# EAGLE board cnc_breakout (EAGLE 5.06)
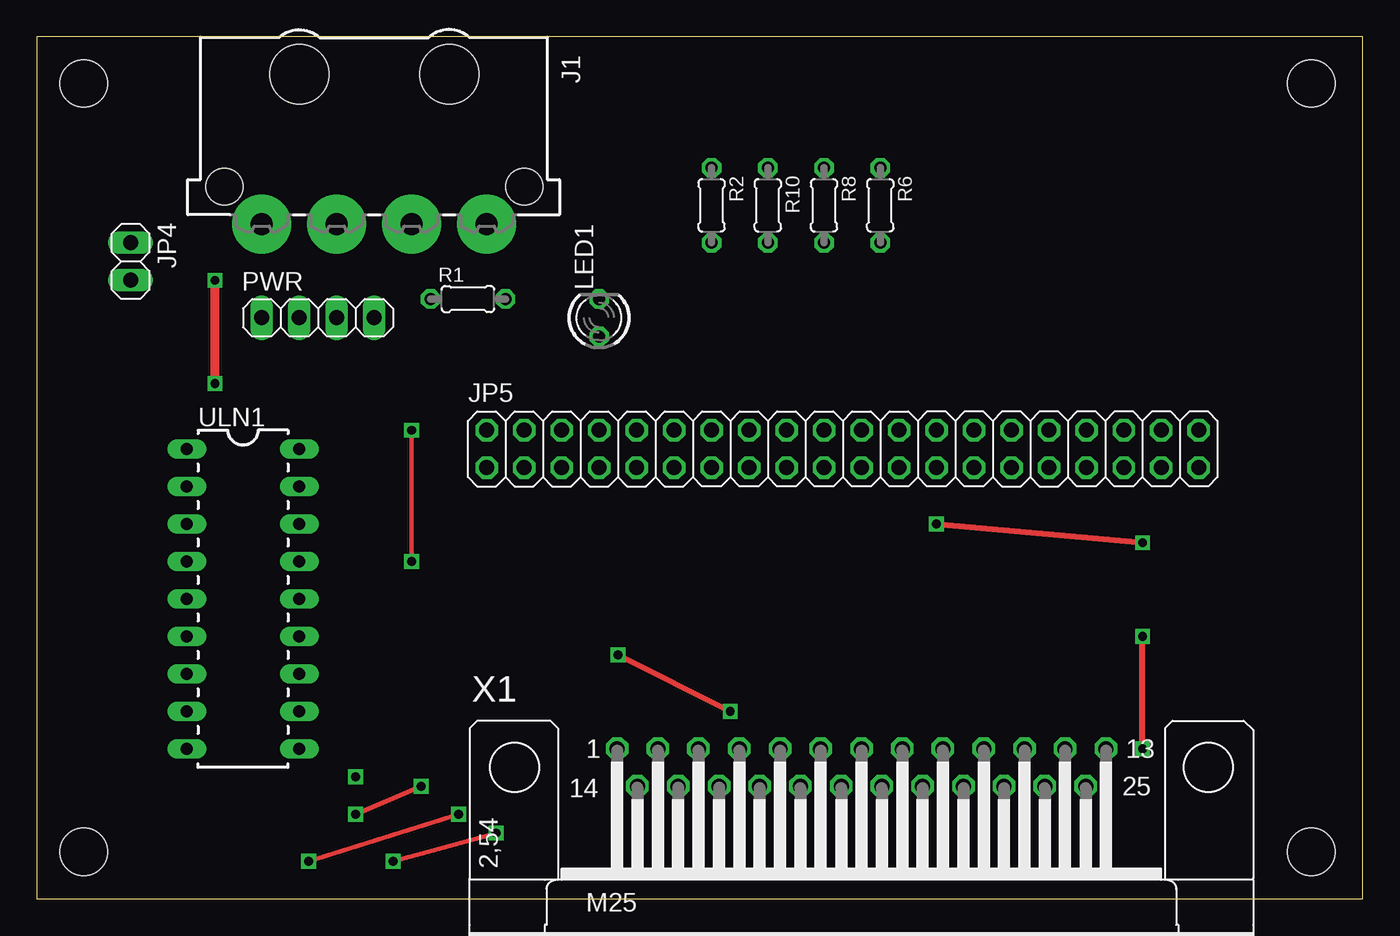
[diagram p0: board, top side]
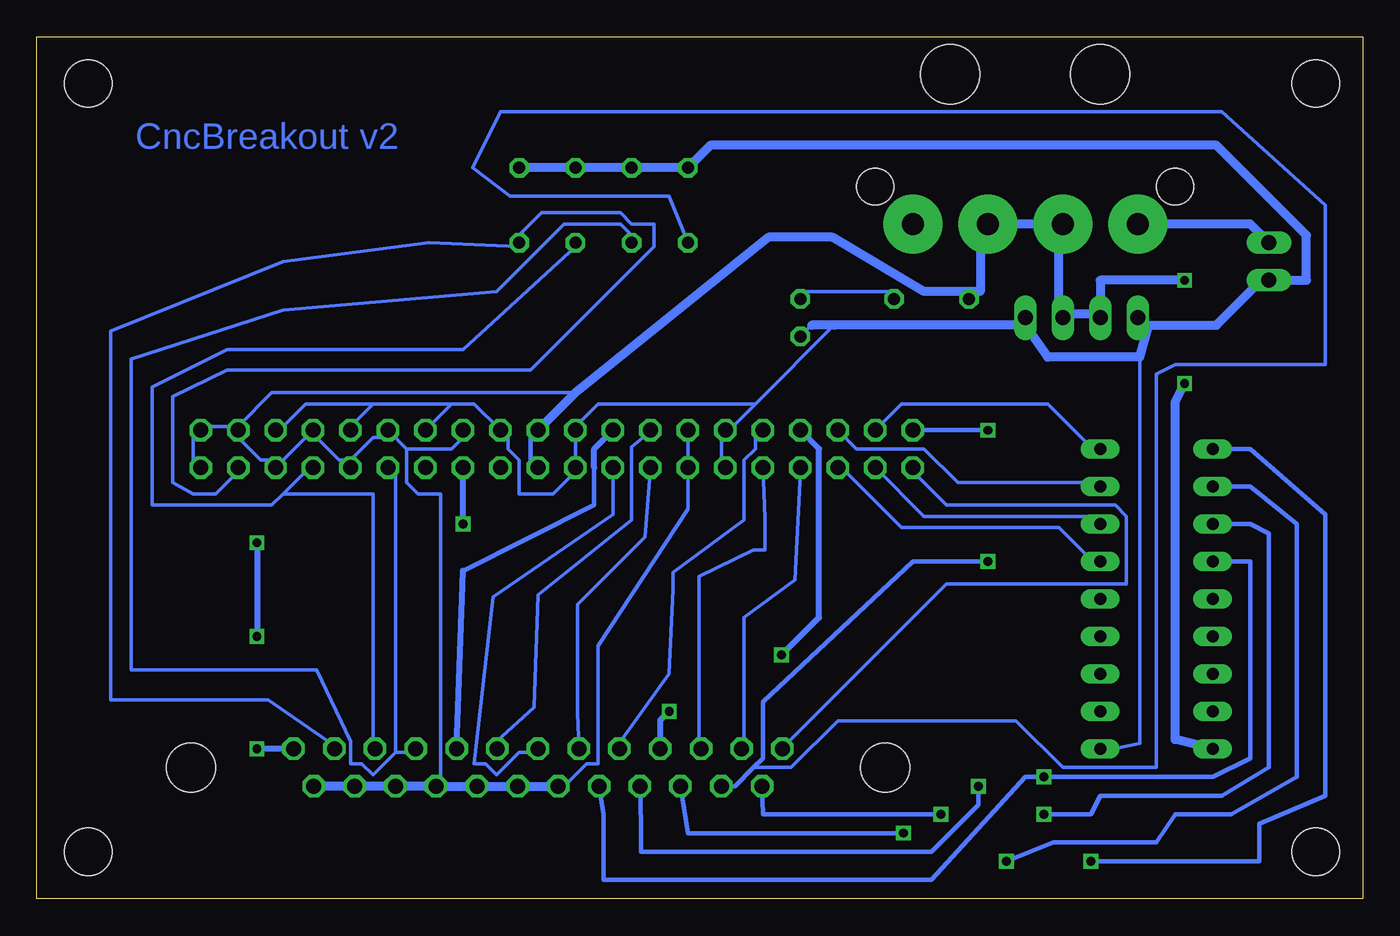
[diagram p1: board, bottom side, seen from below]

Size 89.84 x 58.41 mm. Coordinates in mm from the lower left corner, seen from the top.
Outline: 0,0 89.84,0 89.84,58.41 0,58.41 0,0
Copper layers (1*16): Top 0.035mm / dielectric 1.5mm / Bottom 0.035mm
Design rules "default": minimum track width 10mil, minimum drill 24mil, track to track 8mil, track to pad 8mil, pad to pad 8mil, via to via 8mil, smd to smd 8mil, copper to edge 40mil, drill to drill 8mil, minimum pad ring 10mil, minimum via ring 8mil, stop-mask expansion 4mil, vias tented up to drill 0mil, thermal gap 10mil
Holes 3.2 mm at 3.17,55.24 86.36,55.24 86.36,3.17 3.17,3.17

## Footprints (pad centres in the part's own frame; a part is rotated, then mirrored left to right if it is on the bottom)
827001 = drill 1.5 pad 4 round: 1 -7.62,0; 2 -2.54,0; 3 2.54,0; 4 7.62,0 | hole 4: 5.08,-10.16; -5.08,-10.16 | hole 2.5: 10.16,-2.54; -10.16,-2.54
1X02 = drill 1.016 long: 1 -1.27,0; 2 1.27,0
2X20 = drill 1.016 octagon: 1 -24.13,-1.27; 2 -24.13,1.27; 3 -21.59,-1.27; 4 -21.59,1.27; 5 -19.05,-1.27; 6 -19.05,1.27; 7 -16.51,-1.27; 8 -16.51,1.27; 9 -13.97,-1.27; 10 -13.97,1.27; 11 -11.43,-1.27; 12 -11.43,1.27; 13 -8.89,-1.27; 14 -8.89,1.27; 15 -6.35,-1.27; 16 -6.35,1.27; 17 -3.81,-1.27; 18 -3.81,1.27; 19 -1.27,-1.27; 20 -1.27,1.27; 21 1.27,-1.27; 22 1.27,1.27; 23 3.81,-1.27; 24 3.81,1.27; 25 6.35,-1.27; 26 6.35,1.27; 27 8.89,-1.27; 28 8.89,1.27; 29 11.43,-1.27; 30 11.43,1.27; 31 13.97,-1.27; 32 13.97,1.27; 33 16.51,-1.27; 34 16.51,1.27; 35 19.05,-1.27; 36 19.05,1.27; 37 21.59,-1.27; 38 21.59,1.27; 39 24.13,-1.27; 40 24.13,1.27
LED3MM = drill 0.813 octagon: A -1.27,0; K 1.27,0
1X04 = drill 1.016 long: 1 -3.81,0; 2 -1.27,0; 3 1.27,0; 4 3.81,0
0204/5 = drill 0.813 octagon: 1 -2.54,0; 2 2.54,0
DIL18 = drill 0.813 long: 1 -10.16,-3.81; 2 -7.62,-3.81; 3 -5.08,-3.81; 4 -2.54,-3.81; 5 0,-3.81; 6 2.54,-3.81; 7 5.08,-3.81; 8 7.62,-3.81; 9 10.16,-3.81; 10 10.16,3.81; 11 7.62,3.81; 12 5.08,3.81; 13 2.54,3.81; 14 0,3.81; 15 -2.54,3.81; 16 -5.08,3.81; 17 -7.62,3.81; 18 -10.16,3.81
M25H = drill 1.016 octagon: 1 -16.561,1.27; 2 -13.792,1.27; 3 -11.049,1.27; 4 -8.28,1.27; 5 -5.512,1.27; 6 -2.769,1.27; 7 0,1.27; 8 2.769,1.27; 9 5.512,1.27; 10 8.28,1.27; 11 11.049,1.27; 12 13.792,1.27; 13 16.561,1.27; 14 -15.189,-1.27; 15 -12.421,-1.27; 16 -9.652,-1.27; 17 -6.909,-1.27; 18 -4.14,-1.27; 19 -1.372,-1.27; 20 1.372,-1.27; 21 4.14,-1.27; 22 6.909,-1.27; 23 9.652,-1.27; 24 12.421,-1.27; 25 15.189,-1.27 | hole 3.302: 23.52,0; -23.52,0

## Placement (x,y rotation side)
J1  [827001]  22.86,45.72 180 top
JP4  [1X02]  6.35,43.18 270 top
JP5  [2X20]  54.61,30.48 0 top
LED1  [LED3MM]  38.1,39.37 90 top
PWR  [1X04]  19.05,39.37 0 top
R1  270  [0204/5]  29.21,40.64 0 top
R2  [0204/5]  45.72,46.99 270 top
R6  [0204/5]  57.15,46.99 270 top
R8  [0204/5]  53.34,46.99 270 top
R10  [0204/5]  49.53,46.99 270 top
ULN1  [DIL18]  13.97,20.32 270 top
X1  [M25H]  55.88,8.89 0 top

## Library data of the parts
J1 = con-amp
JP4 = pinhead-1
JP5 PWR = pinhead
LED1 = led
R1 R2 R6 R8 R10 = rcl
ULN1 = SparkFun
X1 = con-subd

## Nets
A_DIR: JP5.18 X1.9
A_STP: JP5.16 X1.8
AUX1: ULN1.2 X1.16
AUX1_AMP: JP5.6 ULN1.17
AUX2: ULN1.3 X1.17
AUX2_AMP: JP5.3 ULN1.16
AUX3: ULN1.4 X1.18
AUX3_AMP: JP5.5 ULN1.15
GND: J1.2 J1.3 JP5.13 JP5.14 JP5.21 JP5.22 JP5.26 JP5.30 JP5.31 JP5.34 JP5.35 JP5.38 JP5.39 JP5.40 PWR.2 PWR.3 R1.1 ULN1.9 X1.19 X1.20 X1.21 X1.22 X1.23 X1.24 X1.25
MACHINE_ERROR: JP5.25 X1.13
N$2: J1.4 JP4.1
N$50: LED1.K R1.2
P: JP5.27
PC_ENABLE: JP5.1 X1.1
PROBE_IN: JP5.2 R2.2 X1.15
SPINDLE_PWM_OUT: ULN1.1 X1.14
SPINDLE_PWM_OUT_AMP: JP5.4 ULN1.18
VDD: JP4.2 JP5.11 JP5.12 JP5.19 JP5.20 JP5.24 JP5.28 JP5.32 JP5.36 LED1.A PWR.1 PWR.4 R2.1 R6.1 R8.1 R10.1 ULN1.10
X: JP5.23
X_DIR: JP5.9 X1.3
X_STP: JP5.7 X1.2
XHOME_SW+: JP5.29 R10.2 X1.10
Y_DIR: JP5.10 X1.5
Y_STP: JP5.8 X1.4
YHOME_SW+: JP5.33 R8.2 X1.11
Z_DIR: JP5.17 X1.7
Z_STP: JP5.15 X1.6
ZHOME_SW+: JP5.37 R6.2 X1.12

## Tracks (layer width: path | path; a pad name or v marks a point on that pad's centre or on a via)
A_DIR
  Bottom 0.305: 52.07,29.21 52.07,26.67 60.96,22.23
  Bottom 0.406: X1.9 60.96,22.23 | JP5.18 52.07,30.48 52.07,29.21
A_STP
  Bottom 0.254: X1.8 58.67,10.67 56.13,12.95 55.88,20.57 49.53,25.65 49.53,30.61 48.77,31.24 JP5.16
AUX1  (via drill 0.6)
  Top 0.305: v24.13,2.54 v31.11,4.45
  Bottom 0.305: ULN1.2 7.62,27.94 4.45,25.4 4.45,8.26 8.89,5.71 12.7,5.71 13.97,3.81 20.95,3.81 v24.13,2.54 | X1.16 45.72,4.45 v31.11,4.45
AUX1_AMP
  Bottom 0.254: ULN1.17 18.29,28.19 27.43,28.19 29.72,30.48 34.29,30.48 JP5.6
AUX2  (via drill 0.6)
  Top 0.305: v21.59,5.71 v26.04,7.62
  Bottom 0.305: ULN1.3 7.62,25.4 6.35,24.77 6.35,8.89 9.53,6.99 17.78,6.99 18.41,5.71 v21.59,5.71 | X1.17 48.9,5.08 48.9,3.17 29.21,3.17 26.04,6.35 v26.04,7.62
AUX2_AMP
  Bottom 0.254: ULN1.16 18.29,25.91 29.72,25.91 JP5.3
AUX3  (via drill 0.6)
  Bottom 0.305: ULN1.4 7.62,22.86 7.62,9.53 10.16,8.26 v21.59,8.26 22.86,8.26 29.21,1.27 31.75,1.27 | X1.18 51.44,5.71 51.44,1.27 31.75,1.27 | 31.75,1.27 31.11,1.27
AUX3_AMP
  Bottom 0.254: ULN1.15 18.29,22.86 20.57,25.15 31.24,25.15 35.05,28.96 JP5.5
GND  (via drill 0.6)
  Top 0.61: v12.06,34.92 v12.06,41.91
  Bottom 0.254: JP5.14 JP5.13 45.72,26.42 51.82,17.14 51.82,9.14 52.58,9.14 54.1,7.62 X1.19 | PWR.3 20.57,39.62 | 20.57,45.72 J1.3 | 76.2,32 78.49,32 JP5.40 79.25,31.24 79.25,29.72 JP5.39 | 64.77,30.48 61.72,30.48 60.96,31.24 JP5.26 | 64.77,30.48 JP5.30 66.29,31.24 67.06,31.24 68.58,29.72 | 68.58,29.72 69.34,29.72 70.87,31.24 JP5.34 JP5.35 73.91,29.72 74.68,29.72 76.2,31.24 JP5.38 76.2,32 | 68.58,29.72 JP5.31 | 9.91,10.67 ULN1.9 | 76.2,32 73.91,34.29 53.34,34.29 | J1.2 25.91,45.72 | 26.67,41.15 R1.1 | 64.77,30.48 64.77,28.19 64.01,27.43 62.48,27.43 62.48,7.62 X1.22
  Bottom 0.305: JP5.21 56.39,29.72 56.39,31.24 JP5.22
  Bottom 0.61: X1.25 X1.24 X1.23 X1.22 | X1.19 X1.20 X1.21 62.48,7.62 | PWR.3 19.81,39.62 18.29,39.62 PWR.2 17.78,41.91 v12.06,41.91 | 20.57,39.62 20.57,45.72 J1.2 | JP5.22 53.34,34.29 40.26,44.83 35.94,44.83 29.72,41.15 26.67,41.15 25.91,41.15 25.91,45.72 | v12.06,34.92 12.7,33.66 12.7,10.79 ULN1.9
MACHINE_ERROR  (via drill 0.6)  (1 unrouted)
  Top 0.406: v60.96,25.4 v74.93,24.13 | v74.93,10.16 74.93,17.78
  Bottom 0.406: v60.96,25.4 JP5.25 | X1.13 v74.93,10.16 | v74.93,24.13 74.93,17.78
N$1  (via drill 0.6)
  other vias: 74.93,17.78
N$2
  Bottom 0.61: J1.4 7.62,45.72 JP4.1
N$50
  Bottom 0.254: R1.2 32,41.15 38.1,41.15 LED1.K
PC_ENABLE
  Bottom 0.254: JP5.1 30.48,28.96 28.19,26.67 16.76,26.67 16,25.91 16,21.34 28.19,21.34 38.86,10.67 X1.1
PROBE_IN  (via drill 0.6)
  Top 0.305: v25.4,22.86 v25.4,31.75
  Bottom 0.254: R2.2 46.99,47.62 57.78,47.62 60.33,49.53 58.42,53.34 9.53,53.34 2.54,46.99 2.54,36.2 12.7,36.2 13.97,35.56 13.97,8.89 20.32,8.89 23.5,12.06 35.56,12.06 38.73,8.89 41.27,8.89
  Bottom 0.305: X1.15 42.55,7.62 41.27,8.89 40.64,9.53 40.64,13.34 30.48,22.86 v25.4,22.86 | v25.4,31.75 JP5.2
SPINDLE_PWM_OUT  (via drill 0.6)
  Top 0.305: v18.41,2.54 v28.57,5.71
  Bottom 0.305: ULN1.1 7.62,30.48 2.54,26.04 2.54,6.99 6.99,5.08 6.99,2.54 v18.41,2.54 | X1.14 40.64,5.71 v28.57,5.71
SPINDLE_PWM_OUT_AMP
  Bottom 0.254: ULN1.18 18.29,30.48 21.34,33.53 31.24,33.53 JP5.4
VDD
  Bottom 0.254: 61.72,33.53 60.2,33.53 JP5.24 57.91,31.24 57.91,30.48 57.15,29.72 57.15,27.43 54.86,27.43 53.34,28.96 JP5.19 JP5.20 53.34,32 51.82,33.53 41.15,33.53 | 61.72,33.53 JP5.28 | 67.06,33.53 68.58,32 JP5.32 | 61.72,33.53 67.06,33.53 | 67.06,33.53 71.63,33.53 73.15,32 JP5.36 | JP5.11 43.43,29.72 43.43,31.24 JP5.12 42.67,32 41.15,33.53 | 37.34,38.86 LED1.A | 35.81,38.86 41.15,33.53 | 15.11,36.7 15.11,10.54 17.53,10.03 ULN1.10 | 6.86,41.91 JP4.2 | 22.86,38.86 PWR.4
  Bottom 0.61: 37.34,38.86 35.81,38.86 22.86,38.86 21.34,36.7 15.11,36.7 14.48,38.86 | R6.1 R8.1 R10.1 R2.1 44.2,51.05 9.91,51.05 3.81,44.96 3.81,41.91 JP4.2 | 14.48,38.86 15.24,38.86 PWR.1 | 6.86,41.91 9.91,38.86 14.48,38.86
X_DIR
  Bottom 0.254: JP5.9 40.51,25.78 40.51,23.62 41.27,23.62 44.96,21.84 44.96,10.67 X1.3
X_STP
  Bottom 0.254: X1.2 41.91,10.67 41.91,19.05 38.48,21.59 38.1,28.96 JP5.7
XHOME_SW+
  Bottom 0.254: 65.53,9.91 67.06,8.38 67.82,9.14 68.58,9.14 68.58,10.67 70.87,15.49 83.44,15.49 83.44,36.58 73.15,39.88 58.67,41.15 54.1,45.72 50.29,45.72 49.53,44.96 R10.2 | 65.53,9.91 64.77,9.91 X1.10 | 65.53,9.91 65.53,28.96 JP5.29
Y_DIR
  Bottom 0.254: JP5.10 41.15,31.24 41.15,30.48 41.91,29.72 41.91,25.65 46.74,22.1 46.74,20.95 46.99,15.24 50.29,10.67 X1.5
Y_STP  (via drill 0.6)
  Top 0.406: v39.37,16.51 v46.99,12.7
  Bottom 0.406: JP5.8 36.83,30.48 36.83,19.05 v39.37,16.51 | X1.4 47.6,12.09 v46.99,12.7
YHOME_SW+
  Bottom 0.254: 73.15,27.43 71.63,28.96 JP5.33 | 73.15,27.43 73.91,26.67 82.04,26.67 82.04,34.67 76.96,37.21 60.96,37.21 53.34,44.2 R8.2 | 73.15,27.43 67.06,27.43 67.06,10.67 X1.11
Z_DIR
  Bottom 0.254: JP5.17 50.8,26.04 58.93,20.45 60.2,9.14 59.44,9.14 58.67,8.38 57.15,9.91 56.39,9.91 X1.7
Z_STP
  Bottom 0.254: X1.6 53.21,12.57 53.21,19.94 48.64,24.51 JP5.15
ZHOME_SW+
  Bottom 0.254: X1.12 70.1,10.67 74.17,13.46 84.84,13.46 84.84,38.48 73.15,43.18 63.25,44.45 57.15,44.2 R6.2 57.15,44.96 55.63,46.48 50.29,46.48 49.53,45.72 48.01,45.72 48.01,44.2 56.39,35.81 76.96,35.81 80.64,34.04 80.64,28.19 79.25,27.43 77.72,27.43 76.2,28.96 JP5.37

## Text on the board
Bottom: CncBreakout v2